# Altium PCB Vector2_0.pcbdoc
Units mil, origin at the board's own origin, x right, y up, seen from the top; angles counter-clockwise.
Board outline 4340 x 4170 mil, 2 copper layers (Top Layer, Bottom Layer); 5 components, 18 nets, 33 pads, 15 vias.
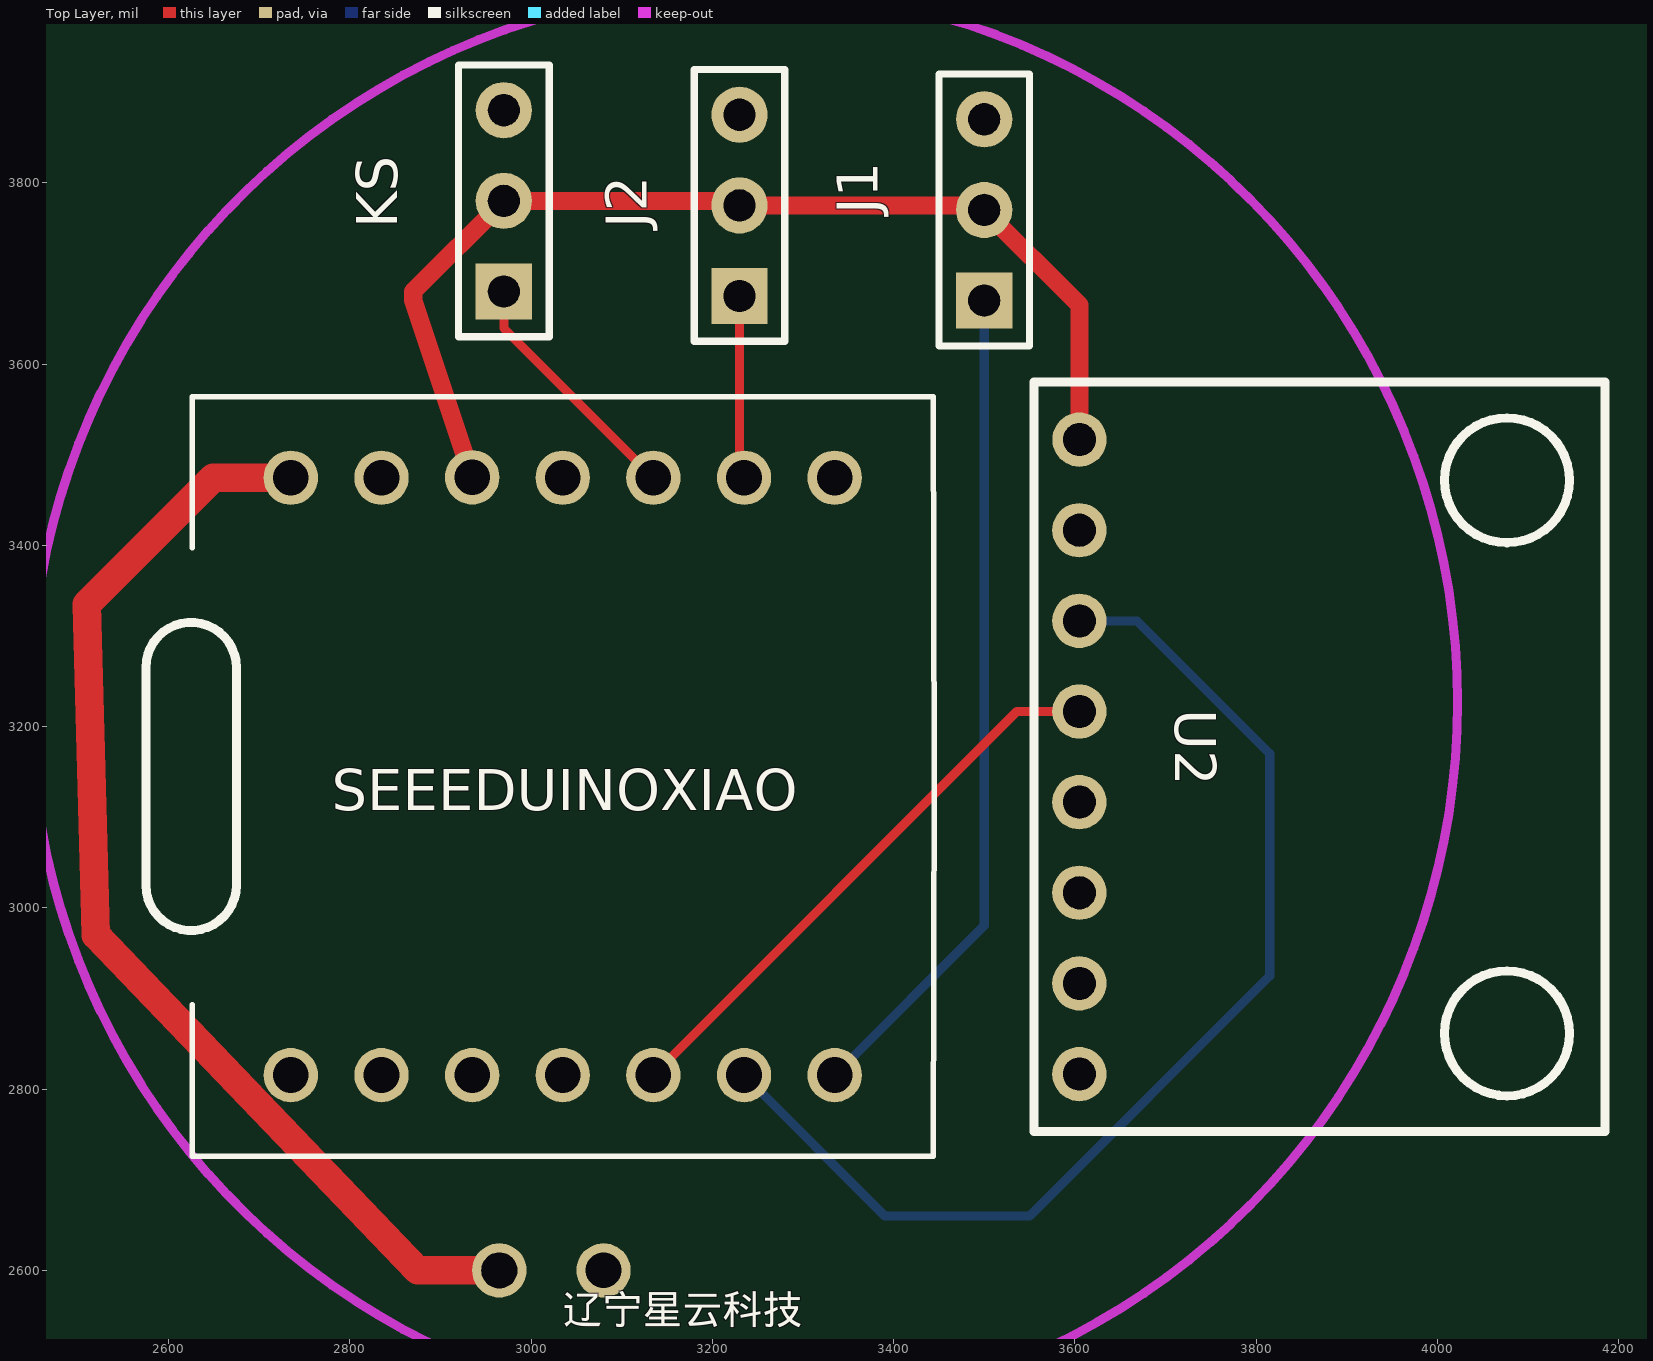
[diagram p0: Top Layer view]
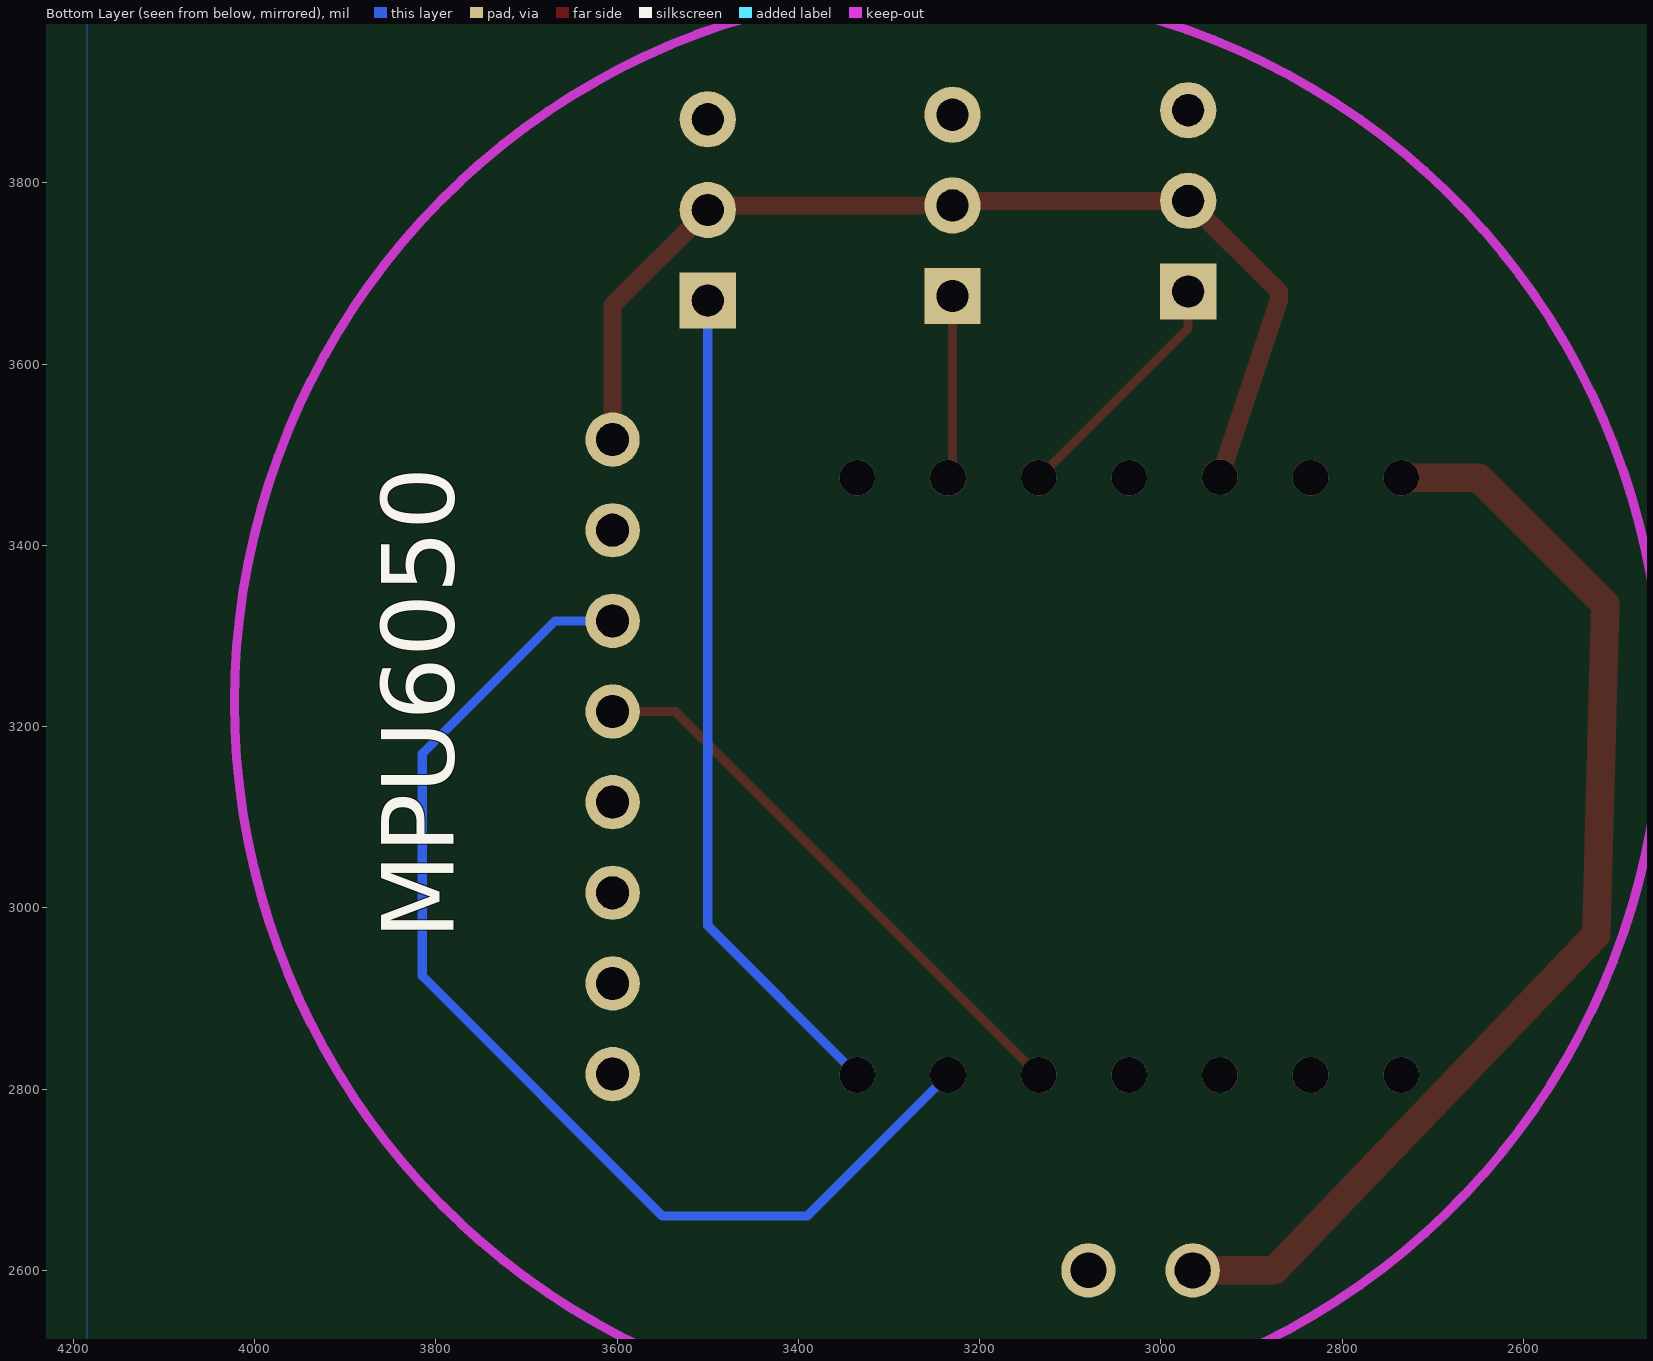
[diagram p1: Bottom Layer view, seen from below]

## Layer stack, top to bottom
Top Layer: signal copper (thickness not stored)
Dielectric: dielectric 12.6, FR-4, Dk 4.8
Bottom Layer: signal copper (thickness not stored)

## Board outline
5340,1000 1000,1000 1000,5170 5340,5170

## Components (designator, comment, footprint, x,y, rotation, side; value= is the part's Value field where it differs from the comment)
J1 "servo" SERVO 3500,3770 r90 top
J2 "servo" SERVO 3230,3775 r90 top
KS "servo" SERVO 2970,3780 r90 top
SEEEDUINOXIAO "seeeduinoxiao" SEEEDUINOXIAO 3035,3145 r0 top
U2 "MPU6050-GY521" MPU6050-GY521 4185,3580 r270 top

## Footprints (in the part's own frame and the unit in brackets; to place one, negate y for a bottom-side part, rotate by r counter-clockwise, add the part's x,y. Pads: shape width x height; smd on the part's side, far side on the other; paste and mask are expansions set on the pad)
MPU6050-GY521 [mil]
  round 60 hole 36 slot 36.2 at 0 deg paste+0 mask+2: 1(63.39,-579.92) 2(163.39,-580) 3(263.39,-580) 4(363.39,-580) 5(463.39,-580) 6(563.39,-580) 7(663.39,-580) 8(763.39,-580)
  silkscreen extent 0,-630 827,0
SEEEDUINOXIAO [mil]
  round 60 smd paste+0 mask+2: 1(-300,-329.51) 2(-200,-329.51) 3(-100,-329.51) 4(0,-329.51) 5(100,-329.51) 6(200,-329.51) 7(300,-329.51) 8(300,329.51) 9(200,329.51) 10(100,329.51) 11(0,329.51) 12(-100,330) 13(-200,329.51) 14(-300,329.51)
  silkscreen extent -460,-419 410,419
SERVO [mil]
  rect 62x62 hole 35 slot 35.2 at 0 deg paste+0 mask+2: 1(-100,0)
  round 62 hole 35 slot 35.2 at 0 deg paste+0 mask+2: 2(0,0) 3(100,0)
  silkscreen extent -150,-50 150,50

## Free pads (board coordinates)
  round 60 hole 36 slot 36.2 at 0 deg paste+0 mask+2: 2(3080,2600)
  round 60 hole 39.37 slot 39.57 at 0 deg paste+0 mask+2: 4(2965,2600)

## Via types
v1: diameter 39.37, hole 39.37, Top Layer to Bottom Layer, tented both sides, 15 vias

## Nets (pads, with @x,y where several pads share a name; then routed paths per layer and width w, separated by ;. In a path a pad name is that pad's centre, name@x,y a point inside that pad or via, vN(x,y) a via of type N, cw(c..) or ccw(c..) an arc to the next point about the centre after c; other vN are vias at no path point)
+5V: pad.4 SEEEDUINOXIAO.14 | length 1250.7
  Top Layer w31.5: v1(2735,3474.51) 2649.51,3474.51 2510,3335 2520,2970 2875,2600 pad.4
GND: J1.3 J2.3 KS.3 pad.2 SEEEDUINOXIAO.13 U2.2
  other v1: 3080,2600 2835,3474.51
U1_1: SEEEDUINOXIAO.1
  other v1: 2735,2815.49
U1_2: SEEEDUINOXIAO.2
  other v1: 2835,2815.49
U1_3: SEEEDUINOXIAO.3
  other v1: 2935,2815.49
U1_4: SEEEDUINOXIAO.4
  other v1: 3035,2815.49
U1_5: SEEEDUINOXIAO.5 U2.4 | length 636.2
  Top Layer w10: v1(3135,2815.49) 3536.12,3216.61 U2.4
U1_6: SEEEDUINOXIAO.6 U2.3 | length 1269.9
  Bottom Layer w10: v1(3235,2815.49) 3390.49,2660 3550,2660 3815,2925 3815,3170 3668.39,3316.61 U2.3
U1_7: J1.1 SEEEDUINOXIAO.7 | length 922.9
  Bottom Layer w10: v1(3335,2815.49) 3500,2980.49 J1.1
U1_8: SEEEDUINOXIAO.8
  other v1: 3335,3474.51
U1_9: J2.1 SEEEDUINOXIAO.9 | length 202.6
  Top Layer w10: J2.1 3230,3479.51 v1(3235,3474.51)
U1_10: KS.1 SEEEDUINOXIAO.10 | length 273.8
  Top Layer w10: KS.1 2970,3639.51 v1(3135,3474.51)
U1_11: SEEEDUINOXIAO.11
  other v1: 3035,3474.51
U1_12: J1.2 J2.2 KS.2 SEEEDUINOXIAO.12 U2.1 | length 1188
  Top Layer w20.08: v1(2935,3475) 2870,3670 2870,3680 KS.2 3225,3780 J2.2 3495,3775 J1.2 3605.08,3664.92 U2.1
U2_5: U2.5
U2_6: U2.6
U2_7: U2.7
U2_8: U2.8

## Polygon pours and split planes (outlines as drawn)
GND on Top Layer (solid): 2065,4245 4375,4245 4385,4235 4385,2135 4415,2105 2355,2105 2285,2175
GND on Bottom Layer (solid): 2315,4055 4165,4055 4185,4075 4185,2265 4265,2185 2545,2185 2475,2255

## Keep-outs
Keep-Out Layer:
  lines w10: 4022.2,3226.69 cw(c3234.8,3226.82) 4022.2,3226.96

## Silkscreen, mask and mechanical layers (free items; w line width, h text height)
Top Overlay:
  text "辽宁星云科技" at 3035,2530 h55.17
Mechanical 1:
  lines w0.5: 3169.99,3084.99 3170.01,3085.01
Document:
  lines w10: 1505,1505 4835,1505 4835,4665 1505,4665 1505,1505

## Text inside footprints (layer, text, board x,y; h text height)
U2: Bottom Overlay "MPU6050" at 3780,2965 h80 r270